# Altium PCB nrf52832_qfaa.PcbDoc
Units mil, origin at the board's own origin, x right, y up, seen from the top; angles counter-clockwise.
Board outline 678.98 x 531 mil, 2 copper layers (Top Layer, Bottom Layer), stack 65.8 mil thick; 16 components, 44 nets, 82 pads, 50 vias.
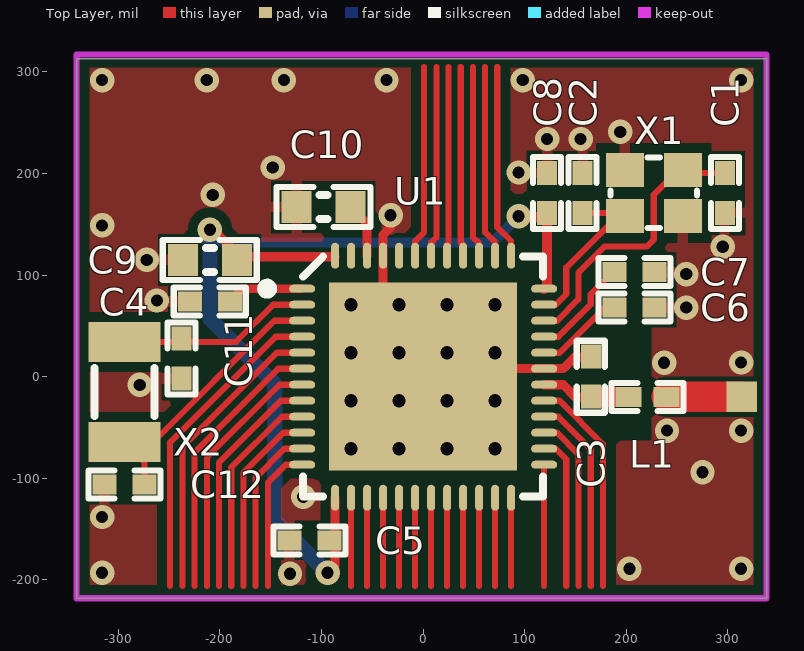
[diagram p0: Top Layer view]
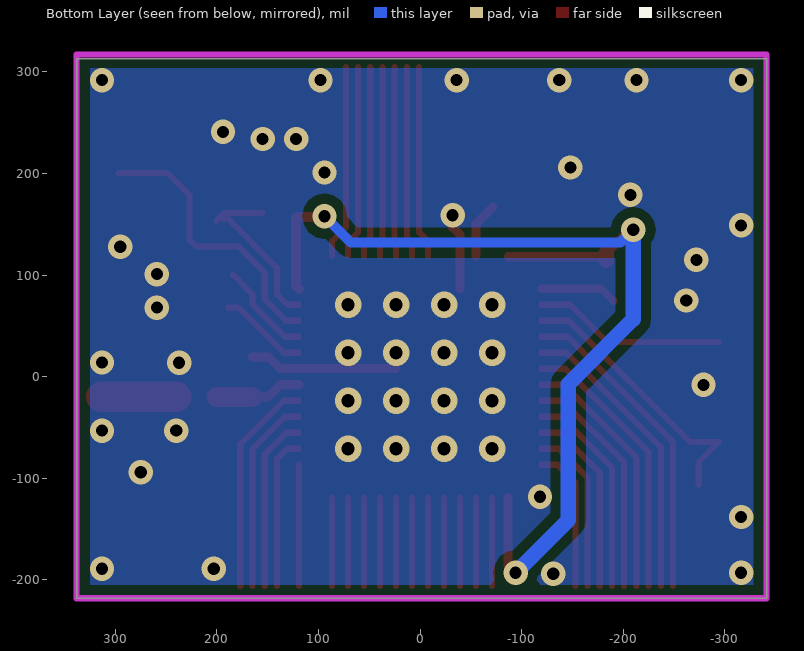
[diagram p1: Bottom Layer view, seen from below]
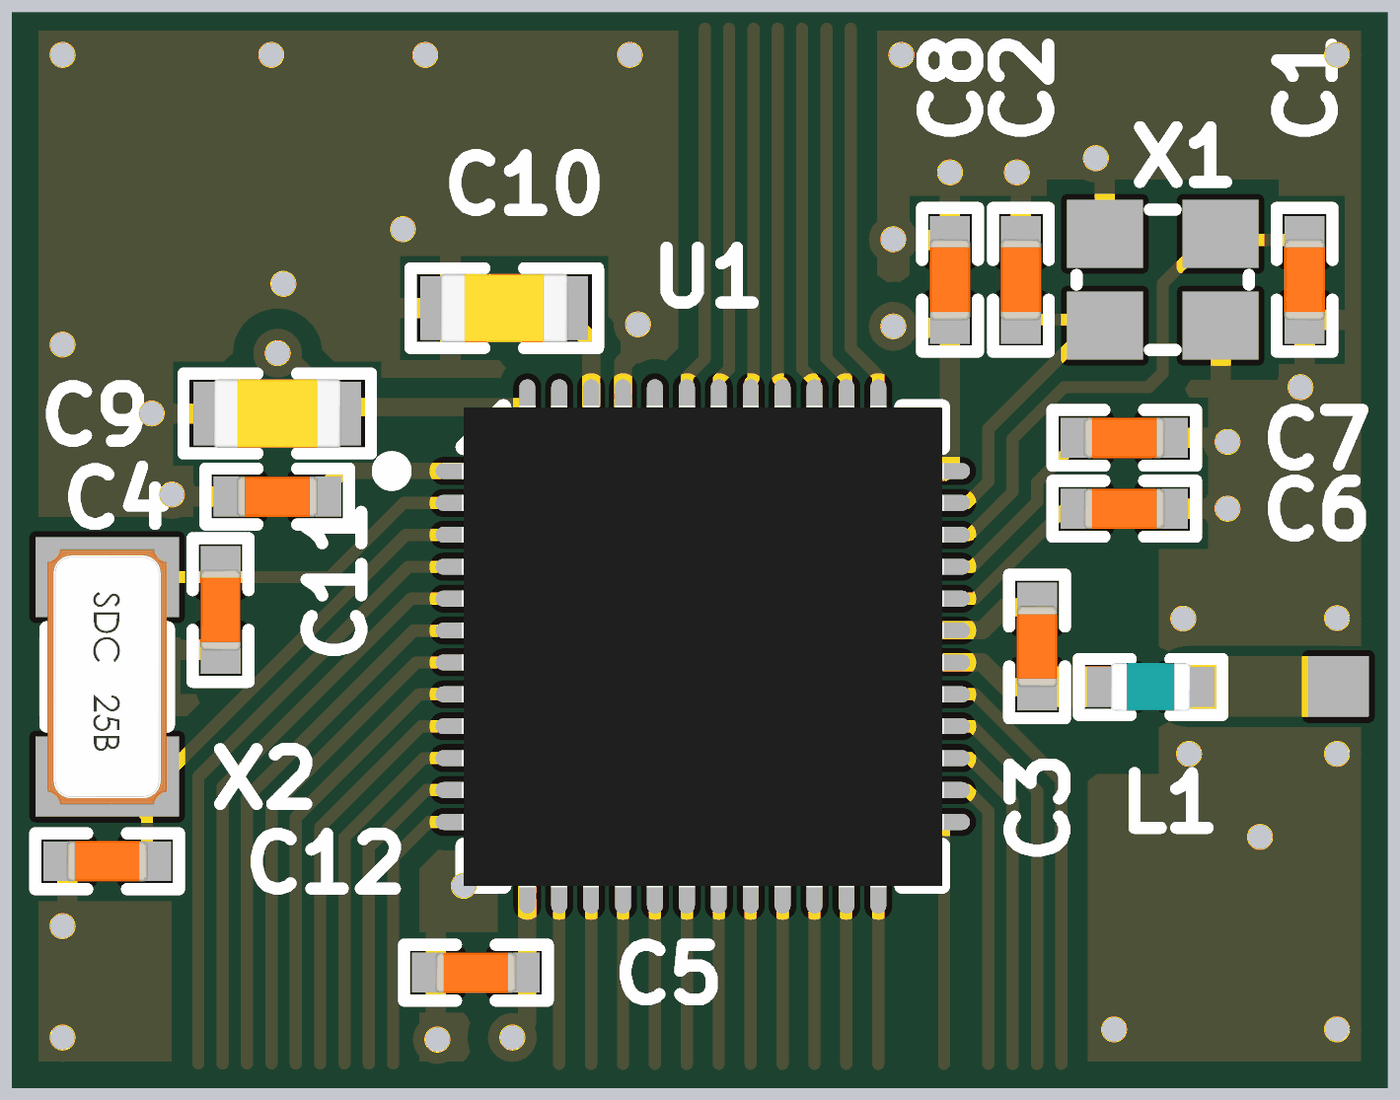
[diagram p2: 3D render of the assembled board from above, using the file's embedded part models]

## Layer stack, top to bottom
Top Solder: solder mask 0.4, Solder Resist, Dk 3.5
Top Layer: signal copper 1.4
Dielectric1: core 63, FR-4, Dk 4.8
Bottom Layer: signal copper 1.4
Bottom Solder: solder mask 0.4, Solder Resist, Dk 3.5

## Board outline
-341,-218 337.98,-218 337.98,313 -341,313

## Design rules (kind name [scope] priority, off if disabled: settings)
Clearance Polygon_ANT [(InNamedPolygon('Top_Layer-GND')) or (InNamedPolygon('Bottom_Layer-GND')) vs InNet('RF')] p1: gap=5
Clearance Polygon [(InNamedPolygon('Top_Layer-GND')) or (InNamedPolygon('Bottom_Layer-GND'))] p2: gap=10
Clearance [All] p3: gap=6
ComponentClearance [All] p1 off: gap=10 collisioncheckmode=3 verticalgap=10 showdistances=FALSE
FabricationTestPointUsage TestPointUsage [All] p1: valid=0 allowmultiple=FALSE
FabricationTestpoint Testpoint [All] p1: side=3 testpointundercomponent=TRUE minsize=40 maxsize=100 preferedsize=60 minholesize=0 maxholesize=40 preferedholesize=32 testpointgrid=1 allowsidetop=TRUE allowsidebottom=TRUE usegrid=TRUE gridtolerance=0.01
Height [All] p1 off: minheight=0 maxheight=1000 prefheight=500
HoleSize [All] p1: absolutevalues=TRUE maxlimit=160 minlimit=12 maxpercent=80.000 minpercent=20.000
MinimumAnnularRing [All] p1 off: minimumring=6
PolygonConnect PolygonConnect_1 [isVia and innet(gnd)] p1: connectstyle=Direct reliefconductorwidth=10 reliefentries=4 polygonreliefangle="90 Angle" airgapwidth=10
PolygonConnect [All] p2: connectstyle=Relief reliefconductorwidth=10 reliefentries=4 polygonreliefangle="90 Angle" airgapwidth=10
RoutingVias [All] p1: holewidth=16 width=32 viastyle="Through Hole" minholewidth=10 minwidth=10 maxholewidth=28 maxwidth=50
SilkToSolderMaskClearance SilkscreenOverComponentPads [IsPad] p1: minsilkscreentomaskgap=10 clearancetoexposedcopper=TRUE
SolderMaskExpansion [All] p1: expansion=3
Width [All] p1: maxlimit=100 minlimit=6 preferedwidth=6
24 further rules are at their usual default settings.

## Components (designator, comment, footprint, x,y, rotation, side; value= is the part's Value field where it differs from the comment)
C1 "12pF" CAPC1005X04L 297,181 r270 top (schematic designator C7)
C2 "12pF" CAPC1005X04L 157,181 r90 top
C3 "0.8pF" CAPC1005X04L 165,0 r270 top (schematic designator C20)
C4 "100nF" CAPC1005X04L -210,74 r180 top (schematic designator C5)
C5 "100nF" CAPC1005X04L -112,-161 r180 top (schematic designator C6)
C6 "100pF" CAPC1005X04L 208,68 r180 top (schematic designator C8)
C7 "100pF" CAPC1005X04L 208,103 r0 top (schematic designator C11)
C8 "100nF" CAPC1005X04L 122,181 r90 top (schematic designator C12)
C9 "4.7µF" CAPC1608X06L -210,115 r180 top
C10 "1.0µF" CAPC1608X06L -98,167 r0 top (schematic designator C7)
C11 "12pF" CAPC1005X04L -238,18 r270 top
C12 "12pF" CAPC1005X04L -294,-106 r180 top
L1 "3.9nH" INDC1005X04L 221,-20 r0 top (schematic designator L2)
U1 "nRF52832-QFAA" QFN40P600X600X90-48N 0,0 r0 top locked
X1 "32MHz" BT-XTAL_2016 227,181 r180 top
X2 "32.768kHz" XTAL_3215 -294,-15 r270 top

## Footprints (in the part's own frame and the unit in brackets; to place one, negate y for a bottom-side part, rotate by r counter-clockwise, add the part's x,y. Pads: shape width x height; smd on the part's side, far side on the other; paste and mask are expansions set on the pad)
BT-XTAL_2016 [mm] "Crystal 2.0 x 1.6 mm"
  rect 0.95x0.85 smd: 1(-0.725,-0.575) 2(0.725,-0.575) 3(0.725,0.575) 4(-0.725,0.575)
  silkscreen extent -1.08,-0.88 1.08,0.88
CAPC1005X04L [mm] "Chip Capacitor, 2-Leads, Body 1.0x0.5mm, IPC High Density"
  rect 0.6x0.5 smd: 1(-0.5,0) 2(0.5,0)
  silkscreen extent -0.9,-0.35 0.9,0.35, body extent -0.51,-0.25 0.51,0.25, height 0.5
CAPC1608X06L [mm] "Chip Capacitor, 2-Leads, Body 1.6x0.8mm, IPC High Density"
  rect 0.75x0.8 smd: 1(-0.675,0) 2(0.675,0)
  silkscreen extent -1.17,-0.5 1.17,0.5, body extent -0.8,-0.43 0.8,0.43, height 0.8
INDC1005X04L [mm] "Chip Inductor, 2-Leads, Body 1.0x0.5mm, IPC High Density"
  rect 0.65x0.5 smd: 1(-0.475,0) 2(0.475,0)
  silkscreen extent -0.9,-0.35 0.9,0.35, body extent -0.5,-0.3 0.5,0.3, height 0.5
QFN40P600X600X90-48N [mm] "QFN, 48-Leads, Body 6,0x6,0mm (max), Pitch 0,40mm, IPC Medium Density"
  oval 0.65x0.2 smd: 1(-3.025,2.2) 2(-3.025,1.8) 3(-3.025,1.4) 4(-3.025,1) 5(-3.025,0.6) 6(-3.025,0.2) 7(-3.025,-0.2) 8(-3.025,-0.6) 9(-3.025,-1) 10(-3.025,-1.4) 11(-3.025,-1.8) 12(-3.025,-2.2) 25(3.025,-2.2) 26(3.025,-1.8) 27(3.025,-1.4) 28(3.025,-1) 29(3.025,-0.6) 30(3.025,-0.2) 31(3.025,0.2) 32(3.025,0.6) 33(3.025,1) 34(3.025,1.4) 35(3.025,1.8) 36(3.025,2.2)
  oval 0.2x0.65 smd: 13(-2.2,-3.025) 14(-1.8,-3.025) 15(-1.4,-3.025) 16(-1,-3.025) 17(-0.6,-3.025) 18(-0.2,-3.025) 19(0.2,-3.025) 20(0.6,-3.025) 21(1,-3.025) 22(1.4,-3.025) 23(1.8,-3.025) 24(2.2,-3.025) 37(2.2,3.025) 38(1.8,3.025) 39(1.4,3.025) 40(1,3.025) 41(0.6,3.025) 42(0.2,3.025) 43(-0.2,3.025) 44(-0.6,3.025) 45(-1,3.025) 46(-1.4,3.025) 47(-1.8,3.025) 48(-2.2,3.025)
  rect 4.7x4.7 smd: 49(0,0)
  silkscreen extent -4.02,-3 3,3, body extent -3.02,-3.02 3.02,3.02, height 0.86
XTAL_3215 [mm] "XTAL SMD 3.2 x 1.5 mm"
  rect 1x1.8 smd: 1(-1.25,0) 2(1.25,0)
  silkscreen extent -0.6,-0.75 0.6,0.75, body extent -1.6,-0.75 1.6,0.75, height 0.81

## Part data
C1 C2 C11 C12: library part C0402-12p, "Capacitor, NP0, ±2%"
C3: library part C0402-0.8p, "Capacitor, NP0, ±5%"
C4 C5 C8: library part C0402-100n, "Capacitor, X7R, ±10%"
C6 C7: library part C0402-100p, "Capacitor, NP0, ±5%"
C9: library part C0603-4µ7, "Capacitor, X5R, ±10%"
C10: library part C0603-1µ0, "Capacitor, X7R, ±10%"
L1: library part L0402-3n9, "Inductor, 170mA, ±0.1nH"
U1: "Multi-protocol Bluetooth Low Energy and 2.4GHz proprietary system-on-chip"
X1: library part XTAL_SMD2016_32MHz_8pF_Epson, "XTAL SMD 2016, 32MHz, Cl=8pF, Tol: ±10ppm, Stab: ±10ppm"
X2: library part "XTAL_FC-135 32.768k", "XTAL SMD 3215, 32.768kHz, 9pF, ±20ppm"

## Free pads (board coordinates)
  rect 30x30 smd: 0(313.74,-19.75)

## Via types
v1: diameter 24, hole 12, Top Layer to Bottom Layer, tented both sides, 34 vias
v2: diameter 25.98, hole 12.99, Top Layer to Bottom Layer, tented both sides, 16 vias

## Nets (pads, with @x,y where several pads share a name; then routed paths per layer and width w, separated by ;. In a path a pad name is that pad's centre, name@x,y a point inside that pad or via, vN(x,y) a via of type N, cw(c..) or ccw(c..) an arc to the next point about the centre after c; other vN are vias at no path point)
DEC1: C4.1 U1.1 | length 76
  Top Layer w8: C4.1@-190.16,74.76 -178.31,86.61 U1.1
DEC2: C6.2 U1.32 | length 88.3
  Top Layer w6: U1.32 134.3,23.62 178.67,68 C6.2@189,68
DEC3: C7.1 U1.33 | length 96
  Top Layer w6: U1.33 133.07,39.37 165,71.3 165,81.19 C7.1@184.06,100.25
DEC4: C10.2 U1.46 | length 54.7
  Top Layer w9: C10.2 -55.12,150.69 U1.46
GND: C1.2 C2.2 C3.1 C4.2 C5.2 C6.1 C7.2 C8.2 C9.2 C10.1 C11.2 C12.2 U1.31 U1.45 U1.49 X1.2 X1.4 | length 221.1
  Top Layer w9: U1.49@-39.37,86.61 U1.45 -39.37,139.63 -32,147 v1(-32,159) ; U1.49@24.31,8 137.77,8 149.06,19.3 C3.1@165.31,19.3
  other v1: -131,-194 -316,-193 203,-189 313,-189 -316,-138 -118,-118.11 275,-94 240,-53 313,-53 -279,-8 237.16,13.76 313,14 259,68 -262,75 259,101 -272,115 295,128 -316,149 -207,179 94,201 -148,206 122,234 155,234 194,241 -316,292 -213,292 -137,292 -36,292 98,292 313,292
  other v2: -70.87,-70.87 -23.62,-70.87 23.62,-70.87 70.87,-70.87 -70.87,-23.62 -23.62,-23.62 23.62,-23.62 70.87,-23.62 -70.87,23.62 -23.62,23.62 23.62,23.62 70.87,23.62 -70.87,70.87 -23.62,70.87 23.62,70.87 70.87,70.87
NetC3_2: C3.2 L1.1 U1.30 | length 86.6
  Top Layer w9: U1.30 137.79,-7.87 149.99,-20.07 C3.2@165.32,-20.07
  Top Layer w20: C3.2@165,-19.87 L1.1@200.31,-19.87
P0.00/XL1: C11.1 U1.2 X2.1 | length 190.1
  Top Layer w6: X2.1 -184.36,34.21 -147.71,70.87 U1.2
P0.01/XL2: C12.1 U1.3 X2.2 | length 274.3
  Top Layer w6: C12.1 -274.32,-83.9 X2.2 -265.82,-64.21 -146.49,55.12 U1.3
P0.02/AIN0: U1.4 | length 314.3
  Top Layer w6: -249,-205.81 -249,-64.39 -145.24,39.37 U1.4
P0.03/AIN1: U1.5 | length 292.8
  Top Layer w6: -236.98,-205.81 -236.98,-69.37 -143.98,23.62 U1.5
P0.04/AIN2: U1.6 | length 271.4
  Top Layer w6: -224.96,-205.81 -224.96,-74.35 -142.73,7.87 U1.6
P0.05/AIN3: U1.7 | length 249.8
  Top Layer w6: -212.85,-205.81 -212.85,-79.37 -141.36,-7.87 U1.7
P0.06: U1.8 | length 228.4
  Top Layer w6: -200.85,-205.81 -200.85,-84.34 -140.14,-23.62 U1.8
P0.07: U1.9 | length 206.9
  Top Layer w6: -188.85,-205.81 -188.85,-89.31 -138.92,-39.37 U1.9
P0.08: U1.10 | length 185.5
  Top Layer w6: -176.85,-205.81 -176.85,-94.28 -137.7,-55.12 U1.10
P0.09: U1.11 | length 164.1
  Top Layer w6: -164.85,-205.81 -164.85,-99.25 -136.47,-70.87 U1.11
P0.10: U1.12 | length 142.6
  Top Layer w6: -152.85,-205.81 -152.85,-104.22 -135.25,-86.61 U1.12
P0.11: U1.14 | length 86.9
  Top Layer w6: -70.87,-206 U1.14
P0.12: U1.15 | length 86.9
  Top Layer w6: -55.12,-206 U1.15
P0.13: U1.16 | length 86.9
  Top Layer w6: -39.37,-206 U1.16
P0.14: U1.17 | length 86.9
  Top Layer w6: -23.62,-206 U1.17
P0.15: U1.18 | length 86.9
  Top Layer w6: -7.87,-206 U1.18
P0.16: U1.19 | length 86.9
  Top Layer w6: 7.87,-206 U1.19
P0.17: U1.20 | length 86.9
  Top Layer w6: 23.62,-206 U1.20
P0.18: U1.21 | length 86.9
  Top Layer w6: 39.37,-206 U1.21
P0.19: U1.22 | length 86.9
  Top Layer w6: 55.12,-206 U1.22
P0.20: U1.23 | length 86.9
  Top Layer w6: 70.87,-206 U1.23
P0.21: U1.24 | length 86.9
  Top Layer w6: 86.61,-206 U1.24
P0.22: U1.27 | length 172.4
  Top Layer w6: U1.27 131.85,-55.12 152.89,-76.16 152.89,-206
P0.23: U1.28 | length 193.8
  Top Layer w6: U1.28 133.07,-39.37 165,-71.3 165,-206
P0.24: U1.29 | length 215.3
  Top Layer w6: U1.29 134.3,-23.62 177,-66.33 177,-206
P0.25: U1.37 | length 191.4
  Top Layer w6: 73,304.88 73,147.22 86.61,133.61 U1.37
P0.26: U1.38 | length 189.9
  Top Layer w6: 61,304.88 61,142.25 70.87,132.39 U1.38
P0.27: U1.39 | length 188.3
  Top Layer w6: 49,304.88 49,137.28 55.12,131.16 U1.39
P0.28/AIN4: U1.40 | length 186.8
  Top Layer w6: 37,304.88 37,132.31 39.37,129.94 U1.40
P0.29/AIN5: U1.41 | length 186.4
  Top Layer w6: U1.41 23.62,130.71 25,132.09 25,304.88
P0.30/AIN6: U1.42 | length 187.9
  Top Layer w6: U1.42 7.87,131.93 13,137.06 13,304.88
P0.31/AIN7: U1.43 | length 189.5
  Top Layer w6: U1.43 -7.87,133.16 1,142.03 1,304.88
RF: L1.2 pad.0 | length 73.7
  Top Layer w30: L1.2@240.02,-19.75 pad.0
SWDCLK: U1.25 | length 119.4
  Top Layer w6: 119.09,-206 U1.25
SWDIO: U1.26 | length 150.8
  Top Layer w6: U1.26 130.5,-70.87 140.89,-81.26 140.89,-206
VDD_NRF: C5.1 C8.1 C9.1 U1.13 U1.36 U1.48 | length 1026.3
  Top Layer w9: v1(-209.84,144.76) -206.58,144.76 -183.27,121.46 -179.92,118.11 U1.48@-87,118.11 ; v1(-94,-193) -86.61,-185.61 U1.13
  Top Layer w10: v1(94,158) 94.68,157.31 122,157.31 122,89.52 U1.36
  Top Layer w15: C9.1@-183.27,114.76 C9.1@-183.27,121.46 ; v1@-96.9,-193 v1(-94,-193)
  Bottom Layer w10: v1(-209.84,144.76) -197.08,132 68,132 v1(94,158)
  Bottom Layer w15: v1(-209.84,144.76) -209.84,56.66 -145.95,-7.24 -145.95,-141.05 v1(-94,-193)
XC1: C1.1 U1.34 X1.1 | length 279.4
  Top Layer w6: U1.34 131.85,55.12 152.89,76.16 152.89,102.47 178.42,128 220,128 227,135 227,179 248.68,200.68 C1.1
XC2: C2.1 U1.35 X1.3 | length 178.3
  Top Layer w6: U1.35 130.5,70.87 140.89,81.26 140.89,107.44 189.45,156 X1.3@197.98,156 ; C2.1@155,161.31 192.66,161.31 X1.3@200.54,153.44
pads on no net: U1.44 U1.47

## Polygon pours and split planes (outlines as drawn)
GND on Top Layer "Top_Layer-GND" (solid, remove dead copper, pour order 1000): -353,410 -353,-266.19 363,-266.19 363,410 -353,410
GND on Bottom Layer "Bottom_Layer-GND" (solid, remove dead copper, pour order 1001): -373,400 -373,-266.19 394,-266.19 394,400 -373,400

## Keep-outs
Keep-Out Layer:
  lines w6: -341,-218 -341,317 337.98,317 337.98,-218 -341,-218

## Other copper
Top Layer:
  pour cut-out: 225,-63 117,-63 117,51 225,51

## Silkscreen, mask and mechanical layers (free items; w line width, h text height)
Mechanical 1:
  lines w6: -341,-218 -341,317 337.98,317 337.98,-218 -341,-218

## Dimensions
337.98,317 to 337.98,-218 on Mechanical 3
-341,-218 to 337.98,-218 on Mechanical 3